# Altium PCB Amplifecation.PcbDoc
Units mm, origin at the board's own origin, x right, y up, seen from the top; angles counter-clockwise.
Board outline 80.65 x 49.78 mm, 2 copper layers (Top Layer, Bottom Layer); 17 components, 13 nets, 41 pads, 16 vias.
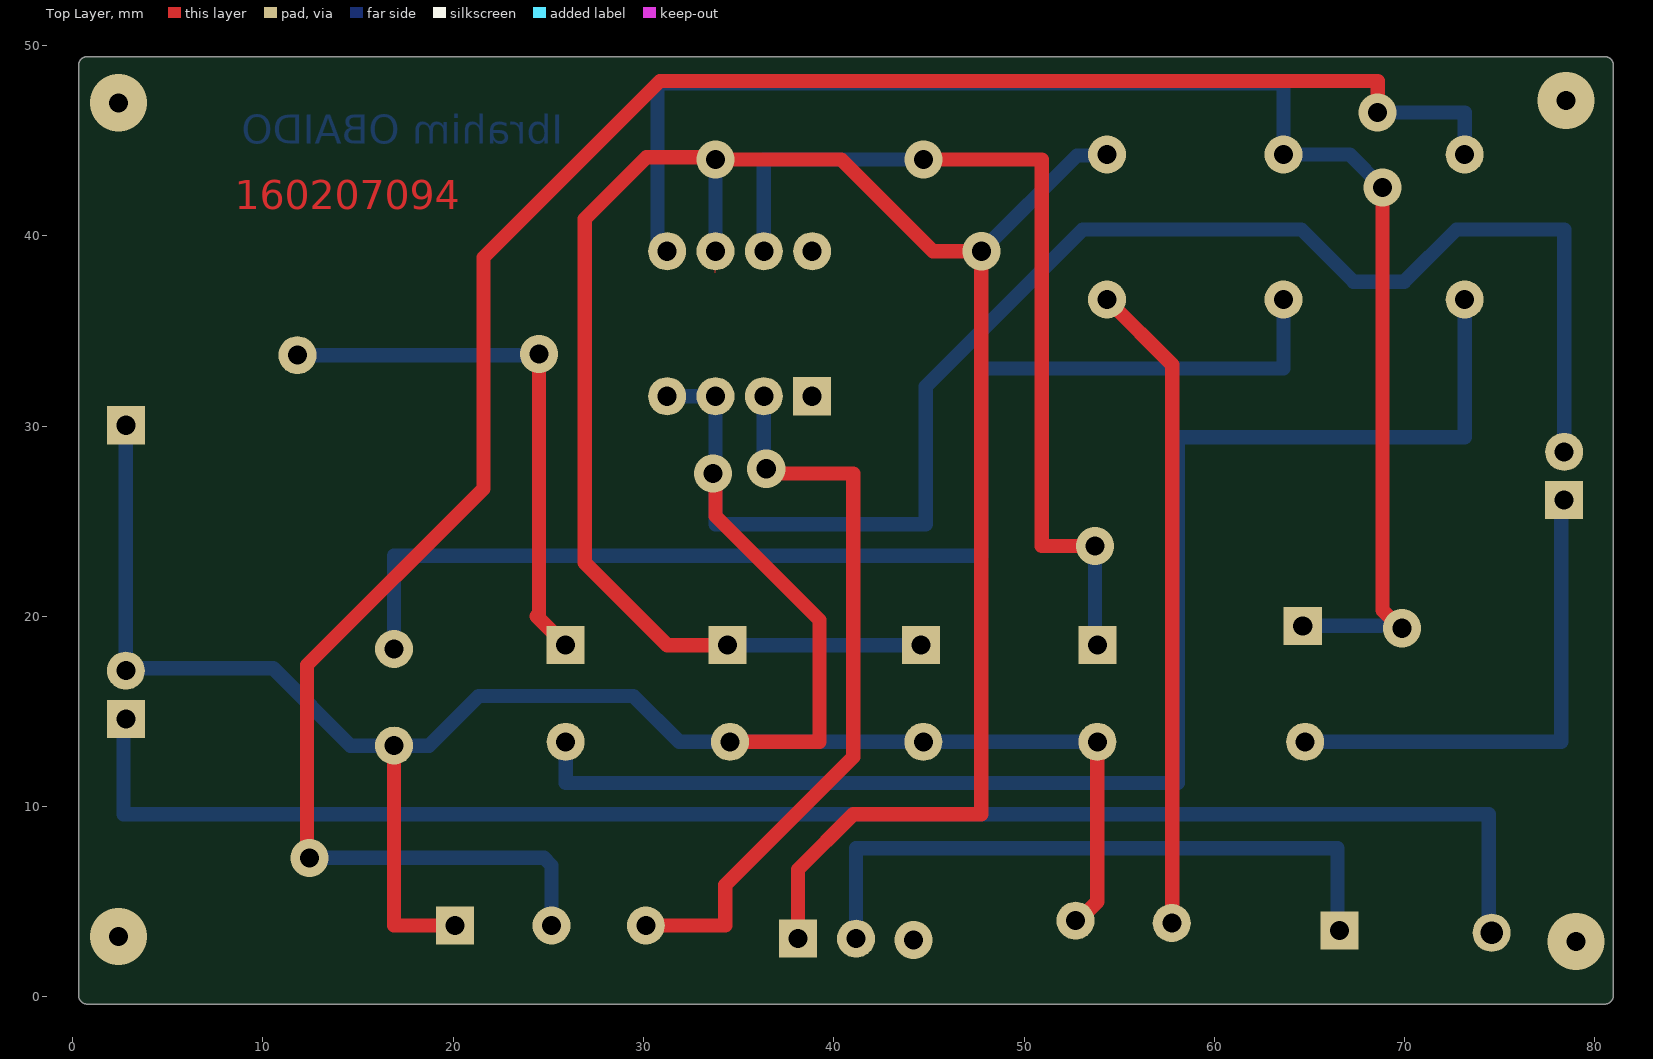
[diagram p0: Top Layer view]
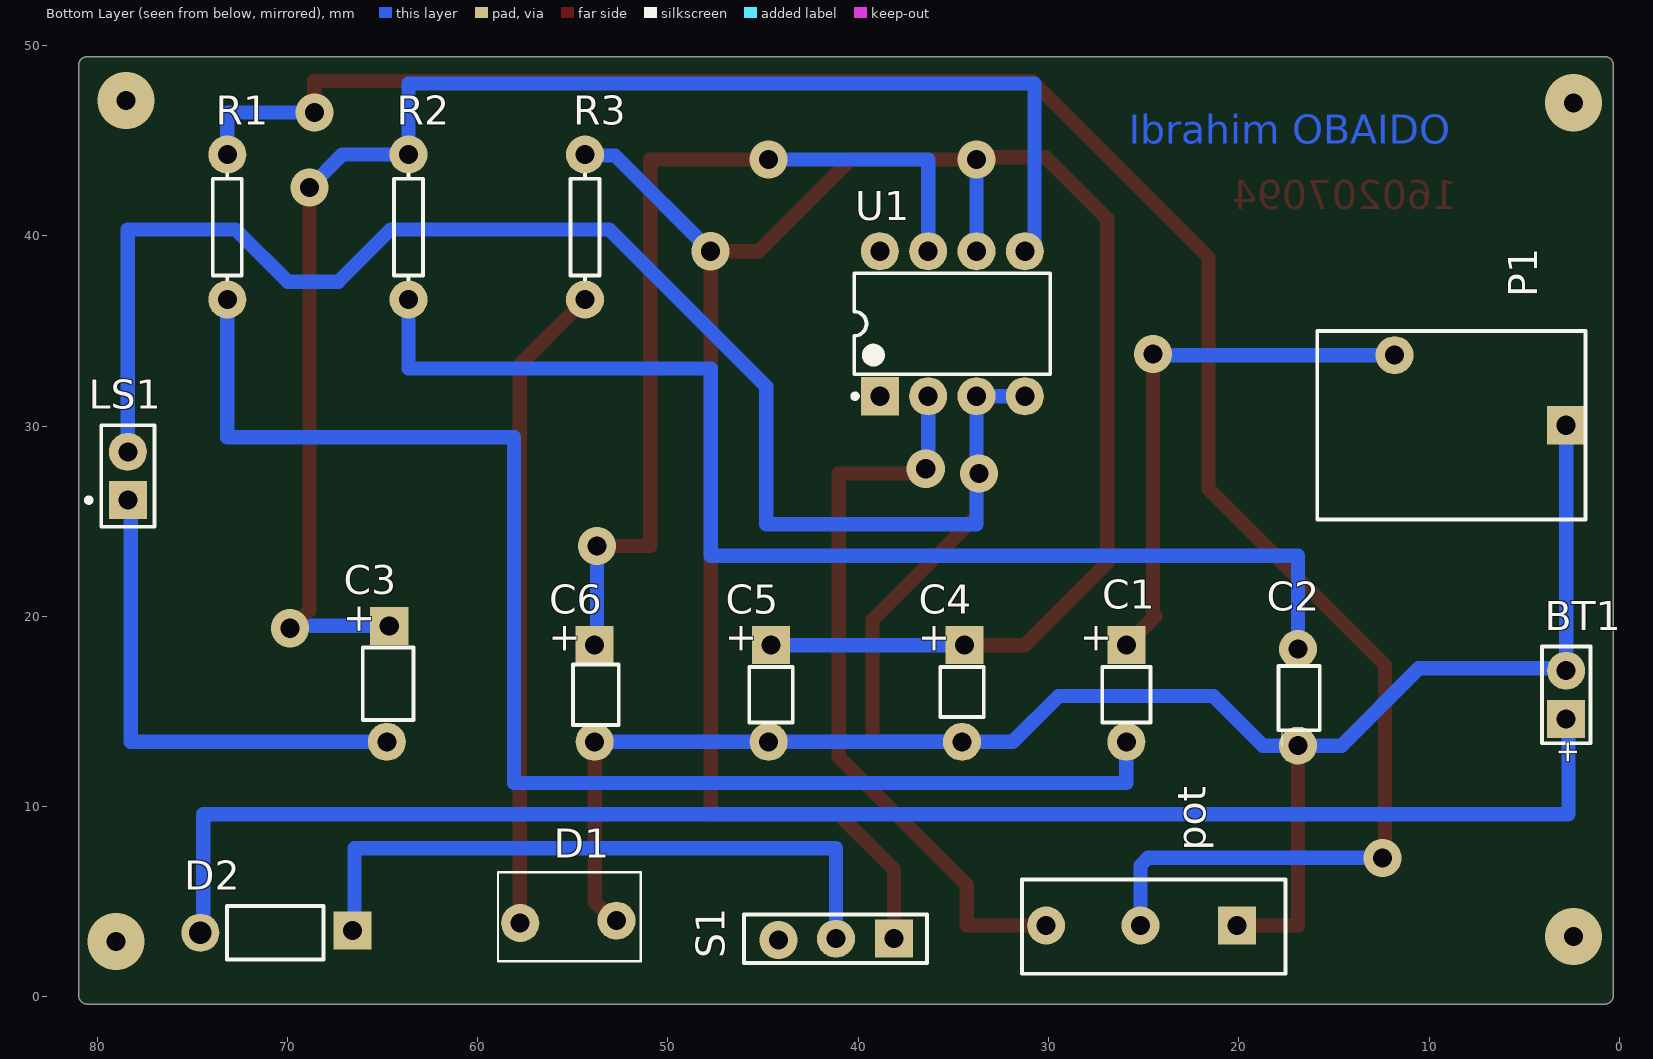
[diagram p1: Bottom Layer view, seen from below]

## Layer stack, top to bottom
Top Solder: solder mask 0.0102, Solder Resist, Dk 3.5
Top Layer: signal copper 0.0356
Dielectric 1: dielectric 0.32, FR-4, Dk 4.8
Bottom Layer: signal copper 0.0356
Bottom Solder: solder mask 0.0102, Solder Resist, Dk 3.5

## Board outline
0.762,-0.372 cw(c0.762,0.073) 0.317,0.073 0.317,48.968 cw(c0.762,48.968) 0.762,49.413 80.518,49.413 cw(c80.518,48.968) 80.963,48.968 80.963,0.073 cw(c80.518,0.073) 80.518,-0.372

## Design rules (kind name [scope] priority, off if disabled: settings)
Clearance [All] p1: gap=0.254 ignorepadtopadclearanceinfootprint=FALSE except(0: Arc-Hole Track-Hole SMDPad-Hole THPad-Hole Via-Hole Fill-Hole Poly-Hole Region-Hole Text-Hole)
PolygonConnect [All] p1: connectstyle=Relief reliefconductorwidth=0.254 reliefentries=4 polygonreliefangle="90 Angle" airgapwidth=0.254
RoutingVias [All] p1: holewidth=1 width=2 viastyle="Through Hole" minholewidth=0.95 minwidth=1.75 maxholewidth=1.1 maxwidth=2.2
SilkToSilkClearance [All] p1: silktosilkclearance=0.183
SilkToSolderMaskClearance [All] p1: minsilkscreentomaskgap=0.064 clearancetoexposedcopper=TRUE
SolderMaskExpansion [All] p1: expansion=0.102 istentingtop=FALSE
Width [All] p1: maxlimit=1 minlimit=0.5 preferedwidth=0.75
28 further rules are at their usual default settings.

## Components (designator, comment, footprint, x,y, rotation, side; value= is the part's Value field where it differs from the comment)
BT1 "Battery" BAT-2 2.794,15.875 r90 bottom
C1 "Cap Pol2" POLAR0.8#1 25.908,8.328 r90 bottom value=4,7uF
C2 "Cap" RAD-0.3 16.764,13.716 r90 bottom value=47nF
C3 "Cap Pol2" POLAR0.8#2 64.643,9.344 r90 bottom value=220uF
C4 "Cap Pol2" POLAR0.8#3 34.417,8.328 r90 bottom value=100uF
C5 "Cap Pol2" POLAR0.8#3 44.577,8.328 r90 bottom value=100nF
C6 "Cap Pol2" POLAR0.8#1 53.848,8.328 r90 bottom value=100nF
D1 "LED1" LED-1 55.753,3.883 r90 bottom
D2 "Diode 1N4007" DO-41 69.342,3.375 r180 bottom
LS1 "Speaker" PIN2 78.382,26.108 r90 bottom
P1 "Header 2" HDR1X2 3.96,32.458 r0 bottom
pot "RPot" VR5 22.629,3.756 r0 bottom value=10K
R1 "Res1" AXIAL-0.3 73.152,40.459 r90 bottom value=1K
R2 "Res1" AXIAL-0.3 63.627,40.459 r90 bottom value=10
R3 "Res1" AXIAL-0.3 54.356,40.459 r90 bottom value=1K
S1 "SW-SPST" SPST-2 40.663,3.062 r0 bottom
U1 "MAX291CPA" PA8 35.052,35.379 r90 bottom

## Footprints (in the part's own frame and the unit in brackets; to place one, negate y for a bottom-side part, rotate by r counter-clockwise, add the part's x,y. Pads: shape width x height; smd on the part's side, far side on the other; paste and mask are expansions set on the pad)
AXIAL-0.3 [mm] "Axial Device, Thru-Hole; 2 Leads; 0.3 in Pin Spacing"
  round 2 hole 1: 1(-3.81,0) 2(3.81,0)
  silkscreen extent -2.77,-0.76 2.77,0.76
BAT-2 [mm] "Battery; 2 Leads"
  rect 2x2 hole 1: 1(-1.27,0)
  round 2 hole 1: 2(1.27,0)
  silkscreen extent -2.54,-1.27 2.54,1.27
DO-41 [mm] "Diode, Axial; Body 5.2 x 2.7 mm (LxDia. max), Lead Dia. 0.86 mm (max)"
  round 2 hole 1.2: 1(-5.23,0)
  rect 2x2 hole 1: 2(2.771,0.127)
  silkscreen extent -3.83,-1.4 1.25,1.4
HDR1X2 [mm] "Connector; Header; 2 Position"
  rect 2x2 hole 1: 1(-1.166,2.413)
  round 2 hole 1: 2(7.851,-1.27)
  silkscreen extent -2.18,-2.54 11.92,7.37
LED-1 [mm] "LED; 2 Leads"
  round 2 hole 1: 1(0,2.007) 2(0.127,-3.048)
  silkscreen extent -2,-4.32 2.67,3.17
PA8 [mm] "DIP, 8-Leads, Row Spacing 7.62mm, Pitch 2.54mm, Body 9.38x7.24mm"
  rect 2x2 hole 1: 1(-3.81,3.81)
  round 2 hole 1: 2(-3.81,1.27) 3(-3.81,-1.27) 4(-3.81,-3.81) 5(3.81,-3.81) 6(3.81,-1.27) 7(3.81,1.27) 8(3.81,3.81)
  silkscreen extent -3.93,-5.15 2.65,5.24, body extent -3.6,-5.15 3.6,5.15, height 4.58
PIN2 [mm] "Photosensitive Diode; 2 Leads"
  rect 2x2 hole 1: 1(0,0)
  round 2 hole 1: 2(2.54,0)
  silkscreen extent -1.4,-1.4 3.94,2.18
POLAR0.8#1 [mm] "Polarized Capacitor; 2 Leads"
  rect 2x2 hole 1: 1(10.16,0)
  round 2 hole 1: 2(5.08,0)
  silkscreen extent 6.1,-1.27 9.02,1.27
POLAR0.8#2 [mm] "Polarized Capacitor; 2 Leads"
  rect 2x2 hole 1: 1(10.16,0)
  round 2 hole 1: 2(4.064,0.127)
  silkscreen extent 5.21,-1.27 9.02,1.4
POLAR0.8#3 [mm] "Polarized Capacitor; 2 Leads"
  rect 2x2 hole 1: 1(10.16,0)
  round 2 hole 1: 2(5.08,0.127)
  silkscreen extent 6.38,-1.02 9.02,1.27
RAD-0.3 [mm] "Radial Cap, Thru-Hole; 2 Leads; 0.3 in Pin Spacing"
  round 2 hole 1: 1(-0.508,0.127) 2(4.572,0.127)
  silkscreen extent -0.52,-1.02 3.68,1.14
SPST-2 [mm] "Switch; 2 Leads"
  rect 2x2 hole 1: 1(-2.54,0)
  round 2 hole 1: 2(0.508,0)
  silkscreen extent -4.28,-1.27 5.33,1.27
VR5 [mm] "Thru-Hole; 3 Leads"
  rect 2x2 hole 1: 1(-2.54,0)
  round 2 hole 1: 2(2.54,0) 3(7.493,0)
  silkscreen extent -5.08,-2.41 8.76,2.54

## Part data
BT1: "Multicell Battery", LatestRevisionDate=17-Jul-2002, LatestRevisionNote="Re-released for DXP Platform.", PackageDescription="Battery; 2 Leads", PackageReference=BAT-2, Published=24-Mar-1999, Publisher="Altium Limited"
C1 C3 C4 C5 C6: "Polarized Capacitor (Axial)", LatestRevisionDate=17-Jul-2002, LatestRevisionNote="Re-released for DXP Platform.", PackageDescription="Polarized Capacitor; 2 Leads", PackageReference=POLAR0.8, Published=8-Jun-2000, Publisher="Altium Limited"
C2: "Capacitor", LatestRevisionDate=17-Jul-2002, LatestRevisionNote="Re-released for DXP Platform.", PackageDescription="Radial Cap, Thru-Hole; 2 Leads; 0.3 in Pin Spacing", PackageReference=RAD-0.3, Published=8-Jun-2000, Publisher="Altium Limited"
D1: "Typical RED GaAs LED", LatestRevisionDate=08-Jul-2005, LatestRevisionNote="Mech Layer 1 removed.", PackageDescription="LED; 2 Leads", PackageReference=LED-1, Published=8-Jun-2000, Publisher="Altium Limited"
D2: "1 Amp General Purpose Rectifier", Code_JEDEC=DO-204-AL, ComponentLink1Description="Manufacturer Link", ComponentLink1URL=http://www.fairchildsemi.com/, ComponentLink2Description=Datasheet, ComponentLink2URL=http://www.fairchildsemi.com/ds/1N%2F1N4001.pdf, DatasheetVersion=1998, LatestRevisionDate=17-Jul-2002, LatestRevisionNote="Re-released for DXP Platform.", PackageDescription="Diode, Axial; Body 5.2 x 2.7 mm (LxDia. max), Lead Dia. 0.86 mm (max)", PackageReference=DO-41, PackageVersion=Aug-1999, Published=8-Jun-2000, Publisher="Altium Limited"
LS1: "Loudspeaker", LatestRevisionDate=17-Jul-2002, LatestRevisionNote="Re-released for DXP Platform.", PackageReference=PIN2, Published=24-Mar-1999, Publisher="Altium Limited"
P1: "Header, 2-Pin", LatestRevisionDate=17-Jul-2002, LatestRevisionNote="Re-released for DXP Platform.", Publisher="Altium Limited"
pot: "Potentiometer", LatestRevisionDate=17-Jul-2002, LatestRevisionNote="Re-released for DXP Platform.", PackageDescription="Variable Resistor, Thru-Hole; 3 Leads", PackageReference=VR5, Published=8-Jun-2000, Publisher="Altium Limited", Set Position=0.5, Sim Note="Enter the Resistance value and the set point into parameter fields."
R1 R2 R3: "Resistor", LatestRevisionDate=17-Jul-2002, LatestRevisionNote="Re-released for DXP Platform.", PackageDescription="Axial Device, Thru-Hole; 2 Leads; 0.3 in Pin Spacing", PackageReference=AXIAL-0.3, Published=8-Jun-2000, Publisher="Altium Limited"
S1: "Single-Pole, Single-Throw Switch", LatestRevisionDate=17-Jul-2002, LatestRevisionNote="Re-released for DXP Platform.", PackageDescription="Switch; 2 Leads", PackageReference=SPST-2, Published=24-Mar-1999, Publisher="Altium Limited"
U1: "8th-Order, Lowpass, Switched-Capacitor Filter", Code_JEDEC=MS-001-AB, ComponentLink1Description="Manufacturer Link", ComponentLink1URL=http://www.maxim-ic.com/, ComponentLink2Description=Datasheet, ComponentLink2URL=http://pdfserv.maxim-ic.com/en/ds/MAX291-MAX296.pdf, DatasheetVersion=Dec-1996, LatestRevisionDate=29-May-2009, LatestRevisionNote="Component Body Added.", PackageDescription="DIP, 8-Pin, Row Spacing 7.62 mm, Pitch 2.54 mm", PackageReference=PA8, PackageVersion="RevB, 21-0043", Published=16-Jan-2001, Publisher="Altium Limited"

## Via types
v1: diameter 2, hole 1, Top Layer to Bottom Layer, 12 vias
v2: diameter 3, hole 1, Top Layer to Bottom Layer, 4 vias

## Nets (pads, with @x,y where several pads share a name; then routed paths per layer and width w, separated by ;. In a path a pad name is that pad's centre, name@x,y a point inside that pad or via, vN(x,y) a via of type N, cw(c..) or ccw(c..) an arc to the next point about the centre after c; other vN are vias at no path point)
GND: BT1.2 C2.1 C4.2 C5.2 C6.2 D1.2 LS1.2 P1.1 pot.1 U1.3 U1.4 | length 189.7
  Top Layer w0.75: C2.1 16.891,3.756 pot.1 ; v1@33.782,27.124 33.782,25.273 39.243,19.812 39.243,13.408 C4.2 ; D1.2@52.728,3.883 53.848,5.003 C6.2
  Bottom Layer w0.75: P1.1 2.794,17.272 10.541,17.272 14.605,13.208 C2.1 18.723,13.208 21.336,15.821 29.464,15.821 31.877,13.408 C4.2 C5.2 C6.2 ; U1.4 U1.3 ; v1(33.655,27.505) 33.782,27.378 33.782,24.838 44.831,24.838 44.831,32.077 53.086,40.332 64.57,40.332 67.31,37.592 69.977,37.592 72.717,40.332 78.382,40.332 LS1.2 ; v1@33.782,27.505 U1.3 ; U1.3@33.973,31.76 U1.3
NetBT1_1: BT1.1 D2.1 | length 83.7
  Bottom Layer w0.75: BT1.1@3.048,14.859 2.667,14.478 2.667,9.598 74.422,9.598 74.422,3.366 D2.1@74.595,3.193
NetC1_1: C1.1 P1.2 | length 28.7
  Top Layer w0.75: v1(24.511,33.782) 24.511,20.139 24.384,20.012 C1.1
  Bottom Layer w0.75: P1.2 24.457,33.728 v1(24.511,33.782)
NetC1_2: C1.2 R1.1 | length 74.8
  Bottom Layer w0.75: C1.2 25.908,11.249 58.087,11.249 58.087,29.41 73.152,29.41 R1.1
NetC2_2: C2.2 R2.1 | length 65.1
  Bottom Layer w0.75: C2.2 16.891,23.187 47.752,23.187 47.752,33.029 63.627,33.029 R2.1
NetC3_1: C3.1 R2.2 U1.5 | length 79.5
  Top Layer w0.75: v1(68.834,42.545) 68.834,20.32 69.686,19.467 v1@69.686,19.213
  Bottom Layer w0.75: U1.5 30.988,39.443 30.734,39.443 30.734,48.006 63.627,48.006 R2.2 67.11,44.269 v1(68.834,42.545) ; C3.1 68.707,19.504
  other v1: 69.85,19.377
NetC3_2: C3.2 LS1.1 | length 26.2
  Bottom Layer w0.75: C3.2 78.232,13.408 78.232,25.958 LS1.1
NetC4_1: C4.1 C5.1 R3.2 S1.1 U1.6 | length 120.6
  Top Layer w0: 33.782,38.046 U1.6
  Top Layer w0.75: v1(33.782,44.015) 40.386,44.015 45.212,39.189 v1(47.752,39.189) 47.752,9.598 41.021,9.598 38.123,6.7 S1.1 ; v1@33.782,44.269 33.643,44.13 30.16,44.13 26.912,40.882 26.912,22.818 31.242,18.488 C4.1
  Bottom Layer w0.75: U1.6 v1(33.782,44.015) v1@33.845,44.015 ; C4.1 C5.1 ; v1(47.752,39.189) 52.781,44.218 54.305,44.218 R3.2
NetC6_1: C6.1 U1.7 | length 47.8
  Top Layer w0.75: v1(44.704,44.015) 50.927,44.015 50.927,23.695 v1(53.721,23.695)
  Bottom Layer w0.75: U1.7 36.322,44.015 v1(44.704,44.015) ; v1(53.721,23.695) 53.721,18.615 C6.1
NetD1_1: D1.1 R3.1 | length 34.3
  Top Layer w0.75: R3.1 57.783,33.222 D1.1@57.783,3.756
NetD2_2: D2.2 S1.2 | length 34.6
  Bottom Layer w0.75: S1.2 41.171,7.82 66.467,7.82 66.467,3.447 D2.2@66.594,3.32
Netpot_2: pot.2 R1.2 | length 110.8
  Top Layer w0.75: v1@12.192,7.312 12.319,7.439 12.319,17.44 21.59,26.711 21.59,38.862 30.861,48.133 68.58,48.133 v1(68.58,46.482)
  Bottom Layer w0.75: v1(12.446,7.312) 24.765,7.312 25.169,6.908 pot.2 ; v1(68.58,46.482) 73.152,46.482 R1.2
Netpot_3: pot.3 U1.2 | length 39.5
  Top Layer w0.75: pot.3 34.29,3.756 34.29,5.883 41.021,12.614 41.021,27.505 v1@36.322,27.505
  Bottom Layer w0.75: v1@36.322,27.505 U1.2
  other v1: 36.449,27.759
pads on no net: U1.1 U1.8
copper on no net:
  other v1: 44.196,2.994
  other v2: 78.994,2.921 2.413,3.175 2.413,46.99 78.486,47.117

## Other copper
Top Layer:
  text "160207094" at 8.509,41.402 h1.52
Bottom Layer:
  text "Ibrahim OBAIDO" at 25.781,44.831 h1.52

## Text inside footprints (layer, text, board x,y; h text height)
BT1: Bottom Overlay "+" at 2.217,12.205 h1.15 r270
C1: Bottom Overlay "+" at 26.858,17.98 h1.5 r270
C3: Bottom Overlay "+" at 65.593,18.996 h1.5 r270
C4: Bottom Overlay "+" at 35.367,17.98 h1.5 r270
C5: Bottom Overlay "+" at 45.527,17.98 h1.5 r270
C6: Bottom Overlay "+" at 54.798,17.98 h1.5 r270